# Allegro board smart_line_x01.brd
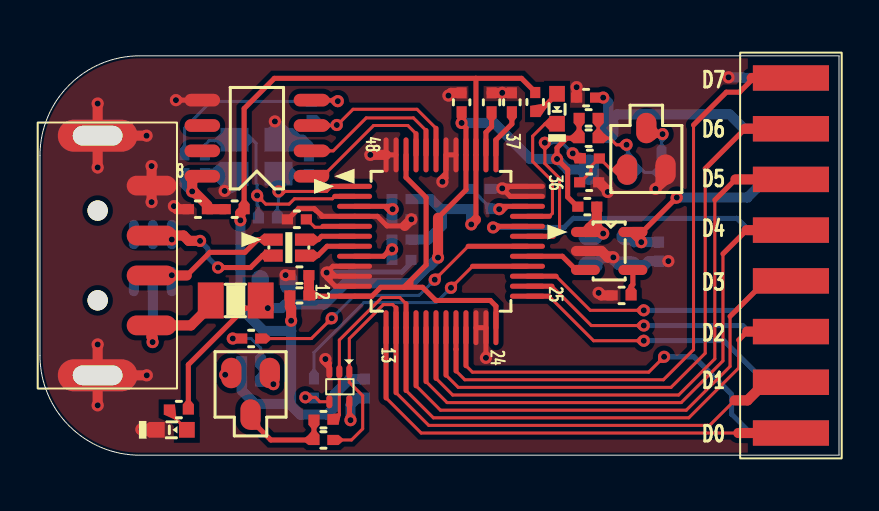
[diagram p0: board, top side]
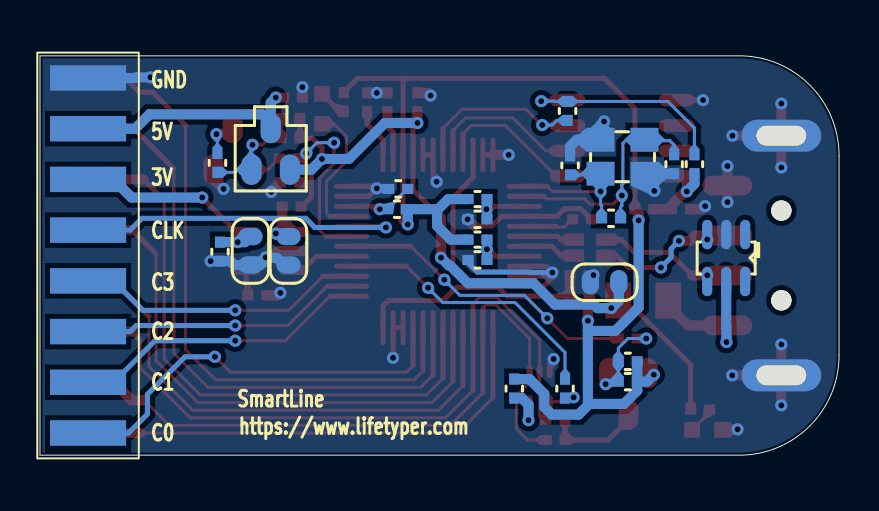
[diagram p1: board, bottom side, seen from below]

Outline 40 x 20 mm; copper layers: TOP, BOTTOM. Coordinates in mm from the lower left corner of the outline.
Outline path: 0,15 arc(1.46,18.54) 5,20 40,20 40,0 5,0 arc(1.46,1.46) 0,5 0,15

## Placement (name value [footprint] x y rotation side)
C1  0.1U_0402_16V_X7R  [C_0402]  18.57 11.81 180 bottom
C2  0.1U_0402_16V_X7R  [C_0402]  18.57 9.78 180 bottom
C3  4.7U_0603_10V_X5R  [C_0603]  12.45 8.66 180 bottom
C4  0.1U_0402_16V_X7R  [C_0402]  12.51 9.02 0 top
C5  0.1U_0402_16V_X7R  [C_0402]  21.11 17.2 90 top
C6  4.7U_0603_10V_X5R  [C_0603]  29.46 9.53 90 bottom
C7  4.7U_0603_10V_X5R  [C_0603]  27.56 9.53 90 bottom
C8  0.1U_0402_16V_X7R  [C_0402]  29.59 8 180 top
C9  0.1U_0402_16V_X7R  [C_0402]  30.99 10.67 270 bottom
C10  0.1U_0402_16V_X7R  [C_0402]  22.61 17.2 90 top
C11  0.1U_0402_16V_X7R  [C_0402]  23.62 17.2 90 top
C12  10nF_0402_25V_X7R  [C_0402]  21.59 13.34 0 bottom
C13  12P_0402_50V8J  [C_0402]  13.46 14.99 270 bottom
C14  12P_0402_50V8J  [C_0402]  8.26 14.1 90 bottom
C15  0.1U_0402_16V_X7R  [C_0402]  8.38 12.32 180 top
C16  0.1U_0402_16V_X7R  [C_0402]  11.05 3.68 180 bottom
C17  0.1U_0402_16V_X7R  [C_0402]  27.94 15.88 180 top
C18  0.1U_0402_16V_X7R  [C_0402]  27.81 17.91 180 top
F1  0.5A_15V_SMD1206P050TF-15  [F_1206]  11.05 7.75 180 top
JOUT1  SUYIN_254201MS008G227ZO  [100MIL_SMT_8P]  37.59 10 270 top
JOUT2  SUYIN_254201MS008G227ZO  [100MIL_SMT_8P]  37.59 10 270 bottom
JUSB1  -  [YJ-USBAM-06]  5.59 10 270 top
L1  WCM-2012-670T_4P  [KING_WCM-2012-670T_4P]  11.68 10.79 0 top
L2  BLM15AG121SN1D  [L_0402]  17.62 12.83 0 bottom
L3  BLM15AG121SN1D  [L_0402]  17.62 10.79 0 bottom
L4  BLM15AG121SN1D  [L_0402]  13.46 8 180 top
LED1  LED_0603_RED  [LED_0603]  6.6 1.27 0 top
LED2  LED_0603_BLUE  [LED_0603]  25.88 17.35 90 top
PU1  TPS76333DBVR_SOT23-5  [TPS73633DBVR_SOT23-5]  27.3 11.18 270 top
Q1  AO3401L_SOT23-3  [AO3401_SOT23-3]  10.54 2.03 0 top
Q2  AO3401L_SOT23-3  [AO3401_SOT23-3]  28.45 16.38 0 bottom
Q3  -  [MMBT3904_NL_SOT23]  30.35 16.38 180 top
R1  470_0402_5%  [R_0402]  6.48 2.29 0 top
R2  0_0402_5%  [R_0402]  26.92 12.45 0 top
R3  10K_0402_5%  [R_0402]  22.61 12.32 180 bottom
R4  12K_0402_1%  [R_0402]  13.34 11.81 180 top
R5  0_0402_5%  [R_0402]  9.27 12.32 0 top
R6  10K_0402_5%  [R_0402]  7.24 14.1 90 bottom
R7  1M_0402_5%  [R_0402]  11.89 11.86 180 bottom
R8  2.2K_0402_5%  [R_0402]  13.59 16.76 90 bottom
R9  470_0402_5%  [R_0402]  24.79 18.16 270 top
R10  0_0402_5%  [R_0402]  16.26 3.81 270 bottom
R11  0_0402_5%  [R_0402]  13.72 3.81 270 bottom
R12  100K_0402_5%  [R_0402]  10.1 4.7 0 bottom
R13  4.7K_0402_5%  [R_0402]  13.72 0.76 0 top
R14  4.7K_0402_5%  [R_0402]  13.72 1.78 0 top
R15  100K_0402_5%  [R_0402]  26.99 16.89 0 top
R16  10K_0402_5%  [R_0402]  11.05 5.84 180 top
R17  10K_0402_5%  [R_0402]  31.11 15.11 270 bottom
R18  10K_0402_5%  [R_0402]  27.05 14.86 0 top
R19  47K_0402_5%  [R_0402]  27.97 13.67 180 top
U1  SRV05-4.TCT_SOT23-6~D  [SRV05-4PTCT_SOT23-6]  4.7 11.05 0 bottom
U2  -  [FT232HL_LQFP48]  15.75 13.46 270 top
U3  93LC56B_ISN_SO8  [93LC56_SO8]  13.59 13.97 90 top
U4  -  [SN74LVC1G66DRLR_SOT]  14.99 3.43 180 top
Y1  12MHZ_9PF_X3S012000DC1H-X  [Y_X3S012000DC1H-X_4P]  11.94 14.1 180 bottom

## Library data of the parts
C1-C15 C18 = CAP NP
C16 C17 = P_CAP NP
F1 = 0.5A_15V_SMD1206P050TF-15
JOUT1 JOUT2 = SUYIN_254201MS008G227ZO
JUSB1 = YJ-USBAM-06
L1 = WCM-2012-670T_4P
L2-L4 = BLM18PG121SN1D_0
LED1 LED2 = 19-21UYOC-S530-A2-TR8_SYO_0603
PU1 = TPS73601DBVR_SOT23-5~D
Q1 Q2 = AO3401L_SOT23-3
Q3 = MMBT3904_NL_SOT23
R1-R6 R8-R17 = R
R7 R18 R19 = P_R
U1 = SRV05-4.TCT_SOT23-6~D
U2 = FT232HL_LQFP48_2
U3 = 93LC66AT-ISN_SO8
U4 = SN74LVC1G66DRLR_SOT23-5
Y1 = 12MHZ_12PF_X3S012000DC1H-X

## Footprints (pads in the part's own frame, mm; a bottom-side part is the same pattern mirrored in y, then rotated)
93LC56_SO8
  oval 0.635x1.778 smd: 1(0,0) 2(1.27,0) 3(2.54,0) 4(3.81,0) 5(3.81,5.461) 6(2.54,5.461) 7(1.27,5.461) 8(0,5.461)
100MIL_SMT_8P
  rect 1.27x3.81 smd: 1(-8.89,0) 2(-6.35,0) 3(-3.81,0) 4(-1.27,0) 5(1.27,0) 6(3.81,0) 7(6.35,0) 8(8.89,0)
AO3401_SOT23-3
  oval 1.016x1.524 smd: 1(0,0) 2(0.965,2.083) 3(-0.965,2.083)
C_0402
  rect 0.559x0.508 smd: 1(0,0) 2(0.95,0)
C_0603
  oval 0.864x1.219 smd: 1(0,0) 2(1.422,0)
F_1206
  rect 1.295x1.803 smd: 1(0,0) 2(2.5,0)
FT232HL_LQFP48
  oval 0.254x1.753 smd: 1(0,0) 2(0.5,0) 3(1,0) 4(1.5,0) 5(2,0) 6(2.5,0) 7(3,0) 8(3.5,0) 9(4,0) 10(4.5,0) 11(5,0) 12(5.5,0) 25(5.5,8.654) 26(5,8.654) 27(4.5,8.654) 28(4,8.654) 29(3.5,8.654) 30(3,8.654) 31(2.5,8.654) 32(2,8.654) 33(1.5,8.654) 34(1,8.654) 35(0.5,8.654) 36(0,8.654)
  oval 1.753x0.254 smd: 13(7.077,1.577) 14(7.077,2.077) 15(7.077,2.577) 16(7.077,3.077) 17(7.077,3.577) 18(7.077,4.077) 19(7.077,4.577) 20(7.077,5.077) 21(7.077,5.577) 22(7.077,6.077) 23(7.077,6.577) 24(7.077,7.077) 37(-1.577,7.077) 38(-1.577,6.577) 39(-1.577,6.077) 40(-1.577,5.577) 41(-1.577,5.077) 42(-1.577,4.577) 43(-1.577,4.077) 44(-1.577,3.577) 45(-1.577,3.077) 46(-1.577,2.577) 47(-1.577,2.077) 48(-1.577,1.577)
KING_WCM-2012-670T_4P
  rect 0.94x0.61 smd: 1(0,0) 2(1.55,0) 3(1.55,-0.8) 4(0,-0.8)
L_0402
  rect 0.559x0.508 smd: 1(0,0) 2(0.95,0)
LED_0603
  rect 0.787x0.787 smd: 1(-0.75,0) 2(0.75,0)
MMBT3904_NL_SOT23
  oval 1.016x1.524 smd: 1(0,0) 2(0.965,2.083) 3(-0.965,2.083)
R_0402
  rect 0.559x0.508 smd: 1(0,0) 2(0.95,0)
SN74LVC1G66DRLR_SOT
  oval 0.305x0.66 smd: 1(-0.5,-0.751) 2(0,-0.751) 3(0.5,-0.751) 4(0.5,0.751) 5(-0.5,0.751)
SRV05-4PTCT_SOT23-6
  oval 0.508x1.473 smd: 1(0,0) 2(0.95,0) 3(1.9,0) 4(1.9,2.35) 5(0.95,2.35) 6(0,2.35)
TPS73633DBVR_SOT23-5
  oval 0.508x1.448 smd: 1(0,0) 2(0.95,0) 3(1.9,0) 4(1.9,2.375) 5(0,2.375)
Y_X3S012000DC1H-X_4P
  rect 1.397x1.194 smd: 1(0,0) 2(2.2,0) 3(2.2,1.7) 4(0,1.7)
YJ-USBAM-06
  round 1.016 hole 1.016 unplated: (-2.25,-2.699) (2.246,-2.699)
  oval 0.991x2.489 smd: 1(3.5,0) 2(1,0) 3(-1,0) 4(-3.5,0)
  oval 1.6x3.988 hole 0.991x2.489: 5(-6,-2.699) 6(6,-2.699)

## Nets
3.3V_OUT_EN: PU1.3(EN) U2.29(ACBUS5)
3V_PULL#: C16.1 Q1.2(G) R12.2 R16.2
5V_EN#: C17.1 Q2.2(G) R15.2 R17.2
5V_EN_L#: Q3.1(COLLECTOR) R17.1
5V_OUT_EN: R18.1 U2.31(ACBUS7/PWRSAV#)
5V_OUT_EN_R: Q3.2(BASE) R18.2 R19.2
+3.3V_CABLE_OUT: C6.2 C9.1 JOUT2.3 PU1.5(OUT)
+3.3V_FTOUT: C16.2 L2.2 L3.2 L4.2 Q1.3(S) R3.2 R5.2 R9.1 R10.1 R12.1 U2.39(VCCD)
+3.3V_PHY: C1.2 L2.1 U2.3(VPHY)
+3.3V_PLL: C2.2 L3.1 U2.8(VPLL)
+3.3V_PULL_UP: Q1.1(D) R13.1 R14.1
+3.3V_ROM: C15.1 R5.1 R6.1 U3.8(VCC)
+3.3V_VCCIO: C4.2 L4.1 U2.12(VCCIO#12) U2.24(VCCIO#24) U2.46(VCCIO#46)
+5V_CABLE_OUT: C18.1 JOUT2.2 Q2.1(D)
+5V_USB: C3.2 C5.1 C17.2 F1.1 Q2.3(S) R1.2 R2.1 R15.1 U2.40(VREGIN)
+V74: R10.2 U4.5(VCC)
GND: C1.1 C2.1 C3.1 C4.1 C5.2 C6.1 C7.1 C8.2 C9.2 C10.2 C11.2 C12.2 C13.1 C14.1 C15.2 C18.2 JOUT2.1 JUSB1.4(GND#4) JUSB1.5(GND#5) JUSB1.6(GND#6) LED1.1(CATHODE) PU1.2(GND) Q3.3(EMITTER) R4.2 R19.1 U1.2 U2.4(AGND#4) U2.9(AGND#9) U2.10(GND#10) U2.11(GND#11) U2.22(GND#22) U2.23(GND#23) U2.35(GND#35) U2.36(GND#36) U2.41(AGND#41) U2.42(TEST) U2.47(GND#47) U2.48(GND#48) U3.5(VSS) U4.3(GND) Y1.2 Y1.4
7.5M_CLK: JOUT2.4 U2.32(ACBUS8)
93_DO: R6.2 R8.2 U3.4(DO)
+LDO_IN: C7.2 PU1.1(IN) R2.2
+USB_PWR: F1.2 JUSB1.1(VCC) U1.5
C0: JOUT2.8 U2.21(ACBUS0)
C1: JOUT2.7 U2.25(ACBUS1)
C2: JOUT2.6 U2.26(ACBUS2)
C3: JOUT2.5 U2.27(ACBUS3)
CONFIG_DONE: LED2.2(ANODE) R9.2
CONFIG_PWR_EN#: LED2.1(CATHODE) U2.33(ACBUS9)
D0: JOUT1.8 U2.13(ADBUS0/TCK/CLK/TXD)
D1: JOUT1.7 R13.2 U2.14(ADBUS1/TDI/DO/RXD) U4.1(A)
D2: JOUT1.6 R14.2 U2.15(ADBUS2/TDO/DI/RTS#) U4.2(B)
D3: JOUT1.5 U2.16(ADBUS3/TMS/CS/CTS#)
D4: JOUT1.4 U2.17(ADBUS4/GPIO_L0)
D5: JOUT1.3 U2.18(ADBUS5/GPIO_L1)
D6: JOUT1.2 U2.19(ADBUS6/GPIO_L2)
D7: JOUT1.1 U2.20(ADBUS7/GPIO_L3)
EE_CLK: U2.44(EECLK) U3.2(CLK)
EE_CS: U2.45(EECS) U3.1(CS)
EE_DATA: R8.1 U2.43(EEDATA) U3.3(DI)
FT_DM: L1.2 U2.6(DM)
FT_DP: L1.3 U2.7(DP)
FT_REF: R4.1 U2.5(REF)
FT_RST#: C12.1 R3.1 U2.34(RESET#)
FT_VCCA: C11.1 U2.37(VCCA)
FT_VCCORE: C10.1 U2.38(VCORE)
FT_XI: C13.2 R7.1 U2.1(OSCI) Y1.1
FT_XO: C14.2 R7.2 U2.2(OSCO) Y1.3
I2C_CONNECT: R11.1 U2.28(ACBUS4)
I2C_CONNECT_L: R11.2 U4.4(C)
L_NR: C8.1 PU1.4(NR/FB)
PULL_UP_EN#: R16.1 U2.30(ACBUS6)
PWR_LED+: LED1.2(ANODE) R1.1
USB_D+: JUSB1.3(D+) L1.4 U1.3
USB_D-: JUSB1.2(D-) L1.1 U1.4

Pads without a net: U1 1 6; U3 6 7

## Via types
v1: diameter 0.61, hole 0.305, TOP to BOTTOM, 71 vias

## Routing (per net, layer and track width the routed paths; a pad name or vN(x,y) marks a point on that pad's centre or on a via; arc(x,y) is an arc through that point)
3.3V_OUT_EN: length 3.2
  TOP w0.254: U2.29 26.15,9.96 26.84,9.28 PU1.3
3V_PULL#: length 4.5
  TOP w0.152: R16.2 9.98,5.73 9.77,5.73 v1(9.65,5.84)
  BOTTOM w0.152: v1(11.68,3.56) 11.56,3.68 C16.1 11.05,5.36 10.57,5.84 v1(9.65,5.84)
5V_EN#: length 5.6
  TOP w0.152: R15.2 C17.1 28.52,15.88 28.85,15.54 v1(29.36,15.54)
  BOTTOM w0.152: R17.2 30.26,14.16 30.12,14.3 Q2.2 29.46,14.35 29.46,15.16 29.41,15.21 29.41,15.49 v1(29.36,15.54)
5V_EN_L#: length 1.9
  TOP w0.152: Q3.1 30.66,16.08 v1(31.17,16.08)
  BOTTOM w0.152: v1(31.17,16.08) 31.11,16.03 R17.1
5V_OUT_EN: length 8.5
  TOP w0.152: v1(26.67,15.11) 26.92,14.86 R18.1 ; v1(25.27,15.65) 25.27,14.6 26.01,13.87 26.01,11.28 25.69,10.96
  TOP w0.254: 25.69,10.96 U2.31
  BOTTOM w0.152: v1(25.27,15.65) 26.14,15.65 v1(26.67,15.11)
5V_OUT_EN_R: length 3.3
  TOP w0.152: Q3.2 28.59,14.3 28.03,14.86 R18.2 27.98,14.86 27.58,14.46 27.58,14.2 27.04,13.67 R19.2
+3.3V_CABLE_OUT: length 11.3
  TOP w0.254: 30.15,11.18 v1(31.88,12.9)
  TOP w0.508: v1(30.1,10.67) 30.1,10.76 PU1.5 30.15,11.18
  BOTTOM w0.508: C9.1 v1(30.1,10.67) 29.74,10.67 C6.2 ; JOUT2.3 36.32,13.81 35.42,12.9 v1(31.88,12.9)
+3.3V_FTOUT: length 58.5
  TOP w0.254: 21.82,18.87 11.73,18.87 10.22,17.36 R5.2 ; 21.82,18.87 21.82,18.87 U2.39 21.82,11.79 ; 21.82,18.87 24.1,18.87 24.79,18.19 R9.1
  TOP w0.508: v1(21.59,11.56) 21.82,11.79 ; R5.2 10.03,12.13 10.03,11.77 v1(10.03,11.76) ; L4.2 12.51,7.43 12.57,7.37 v1(12.57,6.73)
  BOTTOM w0.254: 12.63,2.44 12.63,2.46 12.57,2.52
  BOTTOM w0.508: R12.1 C16.2 ; C16.2 10.1,3.24 10.77,2.57 12.53,2.57 12.57,2.52 12.57,6.22 ; C16.2 9.62,3.68 v1(9.27,4.03) ; 20.12,12.32 20.12,11.49 19.43,10.79 L3.2 ; 20.12,12.32 20.07,12.32 19.56,12.83 L2.2 ; 20.12,12.32 R3.2 21.59,12.25 v1(21.59,11.56) ; v1(10.03,11.76) 10.03,7.39 11.2,6.22 12.57,6.22 ; 12.63,2.44 13.04,2.03 14.38,2.03 14.76,2.41 14.76,3.07 15.49,3.81 R10.1 ; v1(12.57,6.73) 12.57,6.22
+3.3V_PHY: length 3
  TOP w0.254: v1(17.65,12.32) 17.51,12.46 U2.3
  BOTTOM w0.508: C1.2 17.62,12.35 ; 17.62,12.35 v1(17.65,12.32) ; 17.62,12.35 L2.1
+3.3V_PLL: length 3
  TOP w0.254: v1(17.63,10.31) 17.55,10.31 17.2,9.96 U2.8
  BOTTOM w0.508: 17.62,10.31 C2.2 ; 17.62,10.31 v1(17.63,10.31) ; 17.62,10.31 L3.1
+3.3V_PULL_UP: length 4.9
  TOP w0.254: Q1.1 10.54,1.78 11.56,0.76 R13.1 R14.1
+3.3V_ROM: length 4.3
  TOP w0.254: 7.86,13.97 U3.8 ; 8.38,12.52 C15.1
  TOP w0.508: 7.86,13.97 7.62,13.73 v1(7.62,13.21) 7.7,13.21 8.38,12.52 ; R5.1 C15.1
  BOTTOM w0.508: v1(7.62,13.21) 7.24,13.59 R6.1
+3.3V_VCCIO: length 19.6
  TOP w0.254: L4.1 13.94,8 13.98,7.96 U2.12 16.61,7.96 17.06,8.41 18.21,8.41 ; 18.21,8.41 19.33,9.53 19.33,12.9 18.33,13.91 U2.46 ; 18.21,8.41 19.15,8.41 19.81,7.75 22.54,7.75 22.82,7.46 U2.24
  TOP w0.508: C4.2 L4.1
+5V_CABLE_OUT: length 11.6
  TOP w0.254: v1(28.19,17.91) C18.1
  BOTTOM w0.508: 28.45,16.64 Q2.1 ; 28.45,16.64 28.45,17.65 v1(28.19,17.91) ; 28.45,16.64 28.88,17.07 34.52,17.07 35.24,16.35 JOUT2.2
+5V_USB: length 39.5
  TOP w0.254: R2.1 26.9,12.45 26.42,12.93 26.42,14.3 v1(25.88,14.83) 25.88,15.39 26.37,15.88 C17.2 R15.1 ; R1.2 7.43,4.53 10.26,7.37 v1(11.4,7.37) ; C5.1 v1(21.11,16.64) 21.11,16.61 21.33,16.39 U2.40 21.33,13.29 19.93,11.89
  TOP w0.508: v1(19.93,9.89) 19.93,11.89
  BOTTOM w0.508: v1(19.93,9.89) 19.53,9.5 19.47,9.5 18.58,8.61 15.29,8.61 14.22,7.54 12.27,7.54 12.09,7.37 v1(11.4,7.37) 11.38,7.37 11.02,7.72 C3.2 ; Q2.3 26.42,14.3 v1(25.88,14.83) 24.54,14.83 22.73,16.64 v1(21.11,16.64)
+V74: length 2.6
  TOP w0.254: v1(15.54,1.75) 15.54,1.98 15.49,2.03 15.49,2.67 U4.5
  BOTTOM w0.508: v1(15.54,1.75) 15.54,2.53 15.88,2.86 R10.2
GND: length 61.3
  TOP w0.254: U3.5 v1(6.81,17.78) ; U2.36 23.24,13.46 v1(23.14,13.36) 23.54,12.96 U2.35 ; C4.1 v1(12.29,9.02) ; 28.42,13.23 v1(28.42,13.18) ; v1(14.35,9.14) 14.53,8.96 U2.10 ; v1(14.35,9.14) 14.67,9.46 U2.9 ; v1(14.35,9.14) 14.35,8.89 14.78,8.46 U2.11 ; 18.26,11.48 17.37,11.48 16.89,11.96 U2.4 14.12,11.96 14.11,11.97 14.09,12.01 14.06,12.04 13.8,12.27 13.73,12.34 12.94,12.34 12.41,11.81 R4.2 ; U2.47 U2.48 ; v1(20.15,13.69) 20.33,13.87 U2.42 U2.41 ; v1(22.33,4.88) U2.23 U2.22 ; U4.3 14.49,4.61 v1(14.29,4.81) ; 31.32,13.84 Q3.3 ; R19.1 27.99,13.67
  TOP w0.508: v1(5.08,1.3) 5.05,1.27 LED1.1 ; PU1.2 28.1,10.23 28.42,9.91 v1(28.7,9.91) ; C8.2 28.09,8 v1(27.97,8.13) ; v1(18.59,11.81) 18.26,11.48 ; JUSB1.5 v1(2.89,14.41) ; JUSB1.5 v1(5.34,16) ; JUSB1.5 v1(2.89,17.61) ; JUSB1.6 v1(5.35,4) ; JUSB1.6 v1(2.89,2.5) ; JUSB1.6 v1(2.89,5.54) ; v1(30.81,13.34) 31.32,13.84 ; v1(20.45,18.01) 20.58,18.15 C5.2 ; v1(5.59,12.67) JUSB1.4 v1(5.59,14.48) ; C18.2 v1(26.86,18.43) ; C11.2 v1(23.14,18.15) C10.2 ; U2.48 v1(16.54,15.04) ; v1(6.71,12.47) 6.86,12.32 C15.2 ; 27.99,13.67 28.42,13.23
  BOTTOM w0.254: C2.1 18.57,9.63 18.11,9.17 15.48,9.17 15.45,9.14 v1(14.35,9.14) ; v1(23.14,13.36) 22.57,13.36 C12.2
  BOTTOM w0.508: v1(11.76,16.71) 11.94,16.54 Y1.4 13.13,15.8 13.46,15.47 C13.1 ; C7.1 27.79,9.53 28.14,9.88 28.68,9.88 v1(28.7,9.91) 28.7,9.78 28.96,9.53 C6.1 30.28,9.53 30.47,9.72 C9.2 v1(31.46,9.72) ; v1(34.47,18.92) 35.15,18.92 35.19,18.89 JOUT2.1 ; v1(9.25,13.23) 9.74,13.73 Y1.2 C14.1
7.5M_CLK: length 17.1
  TOP w0.254: v1(22.68,11.4) 22.74,11.46 U2.32
  BOTTOM w0.254: JOUT2.4 35.48,11.27 34.89,11.86 26.7,11.86 26.24,11.4 v1(22.68,11.4)
93_DO: length 10.9
  TOP w0.152: U3.4 14.86,17.78 v1(14.91,17.73)
  BOTTOM w0.152: v1(14.91,17.73) 14.25,17.73 14.23,17.71 R8.2 8.57,17.71 7.24,16.38 R6.2
+LDO_IN: length 3.9
  TOP w0.254: v1(28.19,11.1) 28.14,11.1 28.07,11.18
  TOP w0.508: 28.07,11.18 PU1.1 27.51,11.38 27.51,11.38 27.87,11.75 ; 27.87,11.75 27.87,11.42 v1(28.19,11.1) ; 27.87,11.75 R2.2
  BOTTOM w0.508: C7.2 27.66,11.05 28.14,11.05 v1(28.19,11.1)
+USB_PWR: length 7.5
  TOP w0.508: F1.2 8.55,7.49 7.56,6.5 JUSB1.1 5.59,5.92 5.64,5.87 v1(5.64,5.66)
  BOTTOM w0.508: U1.5 5.65,6.44 5.64,6.43 v1(5.64,5.66)
C0: length 20.8
  TOP w0.152: 21.33,4.48 21.65,4.16 30.47,4.16 v1(31.24,4.93)
  TOP w0.254: U2.21 21.33,4.48
  BOTTOM w0.254: v1(31.24,4.93) 32.74,4.93 34.62,3.05 34.62,2.06 35.57,1.11 JOUT2.8
C1: length 15
  TOP w0.152: 25.48,7.96 27.71,5.73 v1(30.23,5.73)
  TOP w0.254: U2.25 25.48,7.96
  BOTTOM w0.254: JOUT2.7 36.32,3.65 34.24,5.73 v1(30.23,5.73)
C2: length 14.1
  TOP w0.152: v1(30.23,6.49) 27.6,6.49 25.63,8.46
  TOP w0.254: U2.26 25.63,8.46
  BOTTOM w0.254: v1(30.23,6.49) 35.18,6.49 35.48,6.19 JOUT2.6
C3: length 14.5
  TOP w0.152: 25.84,8.96 27.54,7.26 v1(30.23,7.26)
  TOP w0.254: U2.27 25.84,8.96
  BOTTOM w0.254: v1(30.23,7.26) 34.85,7.26 36.32,8.73 JOUT2.5
CONFIG_DONE: length 1.5
  TOP w0.254: R9.2 25,17.21 LED2.2
CONFIG_PWR_EN#: length 7.1
  TOP w0.152: LED2.1 25.29,16.6 24.66,15.98 24.66,14.71 25.65,13.72 25.65,12.11 25.5,11.96
  TOP w0.254: U2.33 25.5,11.96
D0: length 24.5
  TOP w0.152: 17.33,2.87 19.08,1.11 34.96,1.11
  TOP w0.254: U2.13 17.33,2.87
  TOP w0.508: 34.96,1.11 JOUT1.8
D1: length 35.2
  TOP w0.152: 17.82,3.13 19.46,1.49 33.52,1.49 34.77,2.75 ; R13.2 15.6,0.76 16.15,1.32 16.15,2.98 15.49,3.65 U4.1 15.49,5.83 17.19,7.54 17.66,7.54 17.82,7.38
  TOP w0.254: 17.82,3.13 U2.14 17.82,7.38
  TOP w0.508: 34.77,2.75 35.42,2.75 36.32,3.65 JOUT1.7
D2: length 35.3
  TOP w0.152: 34.98,5.77 34.98,4.37 32.48,1.87 19.69,1.87 18.33,3.24 ; R14.2 14.73,1.78 14.99,2.03 U4.2 14.99,5.77 17.12,7.9 18.01,7.9 18.33,7.58
  TOP w0.254: 18.33,7.58 U2.15 18.33,3.24 ; 34.98,5.77 35.4,6.19
  TOP w0.508: 35.4,6.19 JOUT1.6
D3: length 26.3
  TOP w0.152: 18.82,3.48 20.05,2.25 32.35,2.25 34.54,4.45 34.54,6.95
  TOP w0.254: U2.16 18.82,3.48 ; 34.54,6.95 36.32,8.73
  TOP w0.508: 36.32,8.73 JOUT1.5
D4: length 28.1
  TOP w0.152: 19.33,3.69 20.38,2.63 32.1,2.63 34.19,4.72 34.19,10.08
  TOP w0.254: 34.19,10.08 35.37,11.27 ; U2.17 19.33,3.69
  TOP w0.508: 35.37,11.27 JOUT1.4
D5: length 29.8
  TOP w0.152: 19.82,3.85 20.66,3.01 31.97,3.01 33.78,4.83 33.78,12.78
  TOP w0.254: U2.18 19.82,3.85 ; 33.78,12.78 34.82,13.81
  TOP w0.508: 34.82,13.81 JOUT1.3
D6: length 30.7
  TOP w0.152: 33.3,14.35 33.3,5.11 31.59,3.4 20.94,3.4 20.33,4.01
  TOP w0.254: 33.3,14.35 35.3,16.35 ; U2.19 20.33,4.01
  TOP w0.508: 35.3,16.35 JOUT1.2
D7: length 32
  TOP w0.152: 32.72,16.54 32.72,5.28 31.21,3.78 21.27,3.78 20.83,4.22
  TOP w0.254: U2.20 20.82,5.31 20.83,5.3 20.83,4.22 ; 32.72,16.54 34.36,18.18 35.02,18.18 35.63,18.79 35.63,18.89
  TOP w0.508: JOUT1.1 35.63,18.89
EE_CLK: length 7.9
  TOP w0.152: 19.33,16.26 18.69,16.89 16.33,16.89 14.68,15.24 U3.2
  TOP w0.254: U2.44 19.33,16.26
EE_CS: length 7.5
  TOP w0.152: 18.82,16.1 18.42,16.51 16.7,16.51 14.16,13.97 U3.1
  TOP w0.254: U2.45 18.82,16.1
EE_DATA: length 9.9
  TOP w0.152: v1(14.86,16.54) 14.66,16.54 14.63,16.51 ; 14.63,16.51 U3.3 ; 14.63,16.51 14.86,16.51 15.67,17.32 18.87,17.32 19.82,16.37
  TOP w0.254: U2.43 19.82,16.37
  BOTTOM w0.152: v1(14.86,16.54) 14.35,16.54 14.12,16.76 R8.1
FT_DM: length 2.6
  TOP w0.254: U2.6 14.1,10.96 13.93,10.79 L1.2
FT_DP: length 2.7
  TOP w0.254: L1.3 13.91,9.99 14.37,10.46 U2.7
FT_REF: length 2.6
  TOP w0.152: 14.17,11.46 14.12,11.41 13.76,11.41 13.36,11.81 R4.1
  TOP w0.254: 14.17,11.46 U2.5
FT_RST#: length 3.3
  TOP w0.254: U2.34 23.13,12.46 v1(22.99,12.32)
  BOTTOM w0.152: C12.1 21.62,13.34 22.01,12.94 22.01,12.91 R3.1 v1(22.99,12.32)
FT_VCCA: length 2.5
  TOP w0.254: U2.37 22.82,15.79 23.62,16.59 C11.1
FT_VCCORE: length 2.3
  TOP w0.254: C10.1 22.61,16.45 22.33,16.17 U2.38
FT_XI: length 7.7
  TOP w0.152: v1(11.94,13.21) 14.35,13.21 14.61,13.46
  TOP w0.254: U2.1 14.61,13.46
  BOTTOM w0.152: R7.1 11.89,12.5 11.94,12.55 v1(11.94,13.21) Y1.1 12.84,14.1 12.9,14.04 C13.2
FT_XO: length 12.3
  TOP w0.152: 14.76,12.96 14.64,12.84 12.74,12.84 12.47,12.57 11.3,12.57 v1(10.87,13)
  TOP w0.254: 14.76,12.96 U2.2
  BOTTOM w0.152: R7.2 10.94,12.43 10.87,12.5 v1(10.87,13) 10.87,13.54 10.82,13.59 10.82,15.62 10.64,15.8 Y1.3 8.81,15.8 8.76,15.75 8.47,15.75 8.26,15.53 C14.2
I2C_CONNECT: length 13.8
  TOP w0.152: 21.65,9.46 v1(20.57,8.38)
  TOP w0.254: U2.28 21.65,9.46
  BOTTOM w0.152: R11.1 13.72,5.14 16.22,7.65 19.84,7.65 v1(20.57,8.38)
I2C_CONNECT_L: length 1.8
  TOP w0.152: U4.4 14.01,2.68 13.79,2.9 v1(13.28,2.9)
  BOTTOM w0.152: R11.2 13.63,2.77 13.41,2.77 v1(13.28,2.9)
L_NR: length 1.3
  TOP w0.254: C8.1 29.59,8.46 29.68,8.55 PU1.4
PULL_UP_EN#: length 15.3
  TOP w0.152: v1(19.76,8.79) 21.43,10.46 ; R16.1 13.59,5.84 v1(14.61,6.86)
  TOP w0.254: 21.43,10.46 U2.30
  BOTTOM w0.152: v1(14.61,6.86) 15.75,8 18.97,8 v1(19.76,8.79)
PWR_LED+: length 1.4
  TOP w0.152: R1.1 6.48,2.15 LED1.2
USB_D+: length 7.7
  TOP w0.254: v1(8.92,9.4) 10.54,9.4 11.14,9.99 L1.4
  TOP w0.508: 6.6,11 7.19,11 7.45,10.73 v1(8.01,10.73) ; 6.6,11 v1(6.6,10.8) ; 6.6,11 JUSB1.3
  BOTTOM w0.254: v1(8.01,10.73) 8.41,10.34 8.41,9.9 v1(8.92,9.4) ; U1.3 v1(6.6,10.8)
USB_D-: length 7.2
  TOP w0.254: L1.1 10.9,10.79 10.26,10.16 8.51,10.16 7.35,9
  TOP w0.508: JUSB1.2 7.35,9
  BOTTOM w0.152: U1.4 v1(6.6,9.01)

## Copper pours and planes (outline as drawn; the poured copper is in the pictures)
GND on BOTTOM (solid shape): 9.77,14.15 10.44,13.5 9.3,12.99 9.1,13.02 8.99,13.2 9.04,14.69
GND on BOTTOM (solid shape): 11.87,16.78 11.94,16.79 12.01,16.78 12.44,16.39 11.94,15.73 11.44,16.39
GND on BOTTOM (solid shape): 9.8,14.1 9.04,13.5 8.48,13.97 8.44,14.1 8.48,14.22 9.04,14.69
GND on BOTTOM (solid shape): 13.2,15.92 13.23,15.8 13.2,15.67 12.64,15.2 11.87,15.8 12.64,16.39
GND on TOP: 5,0.13 1.55,1.55 0.13,5 0.13,15 1.55,18.45 5,19.87 39.87,19.87 39.87,0.13 ; 4 cut-outs
GND on BOTTOM: 5,0.13 1.55,1.55 0.13,5 0.13,15 1.55,18.45 5,19.87 39.87,19.87 39.87,0.13 ; 4 cut-outs

Small or netless copper shapes (teardrops, artwork), in the pictures only: 85 on TOP, 58 on BOTTOM

## Text on the board
Ref Des/Silkscreen Bottom: https://www.lifetyper.com | SmartLine | GND | 5V | 3V | CLK | C3 | C2 | C1 | C0
Ref Des/Silkscreen Top: D7 | D6 | D5 | D4 | D3 | D2 | D1 | D0
BODY_CENTER: FIGURE | SIZE | 12.0 | 40.0 | 98.0x39.0 | DRILL CHART: TOP to BOTTOM | ALL UNITS ARE IN MILS | PLATED | NON-PLATED | QTY | 71 | 2
